# Altium PCB GRLV_double_Rail_v0.2b.PcbDoc
Units mil, origin at the board's own origin, x right, y up, seen from the top; angles counter-clockwise.
Board outline 6735 x 10540 mil, 2 copper layers (Top Layer, Bottom Layer); 179 components, 86 nets, 450 pads, 10 vias.
Unrouted connection lines stored in the file: 3.
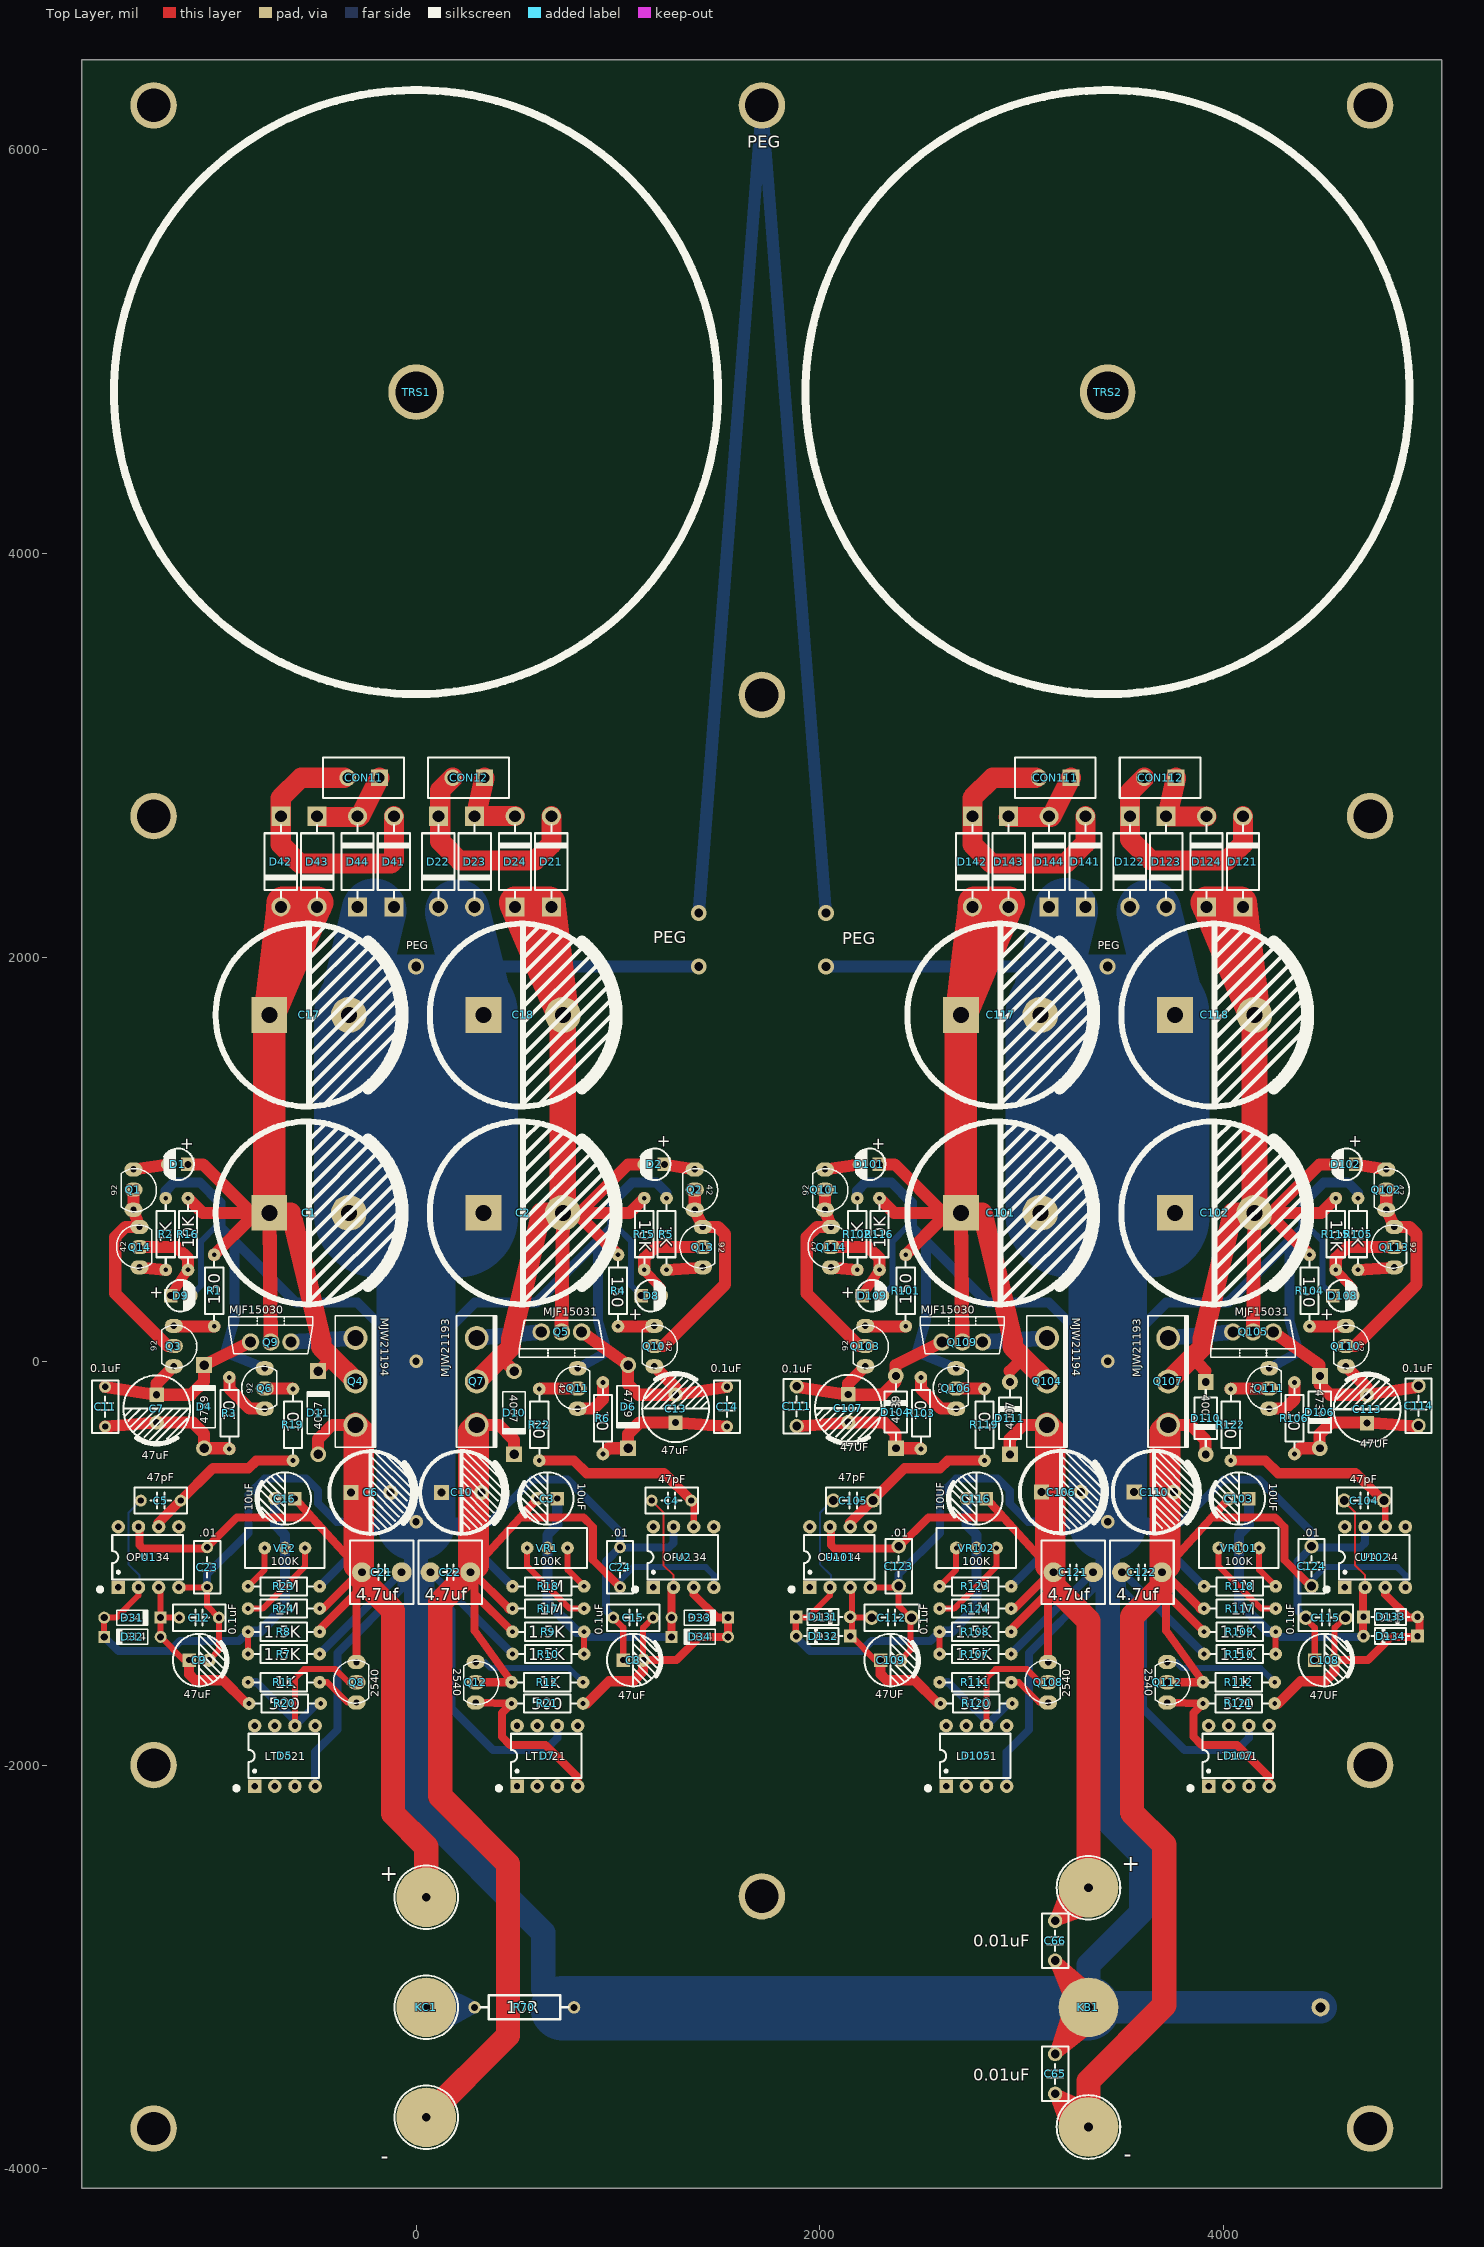
[diagram p0: Top Layer view]
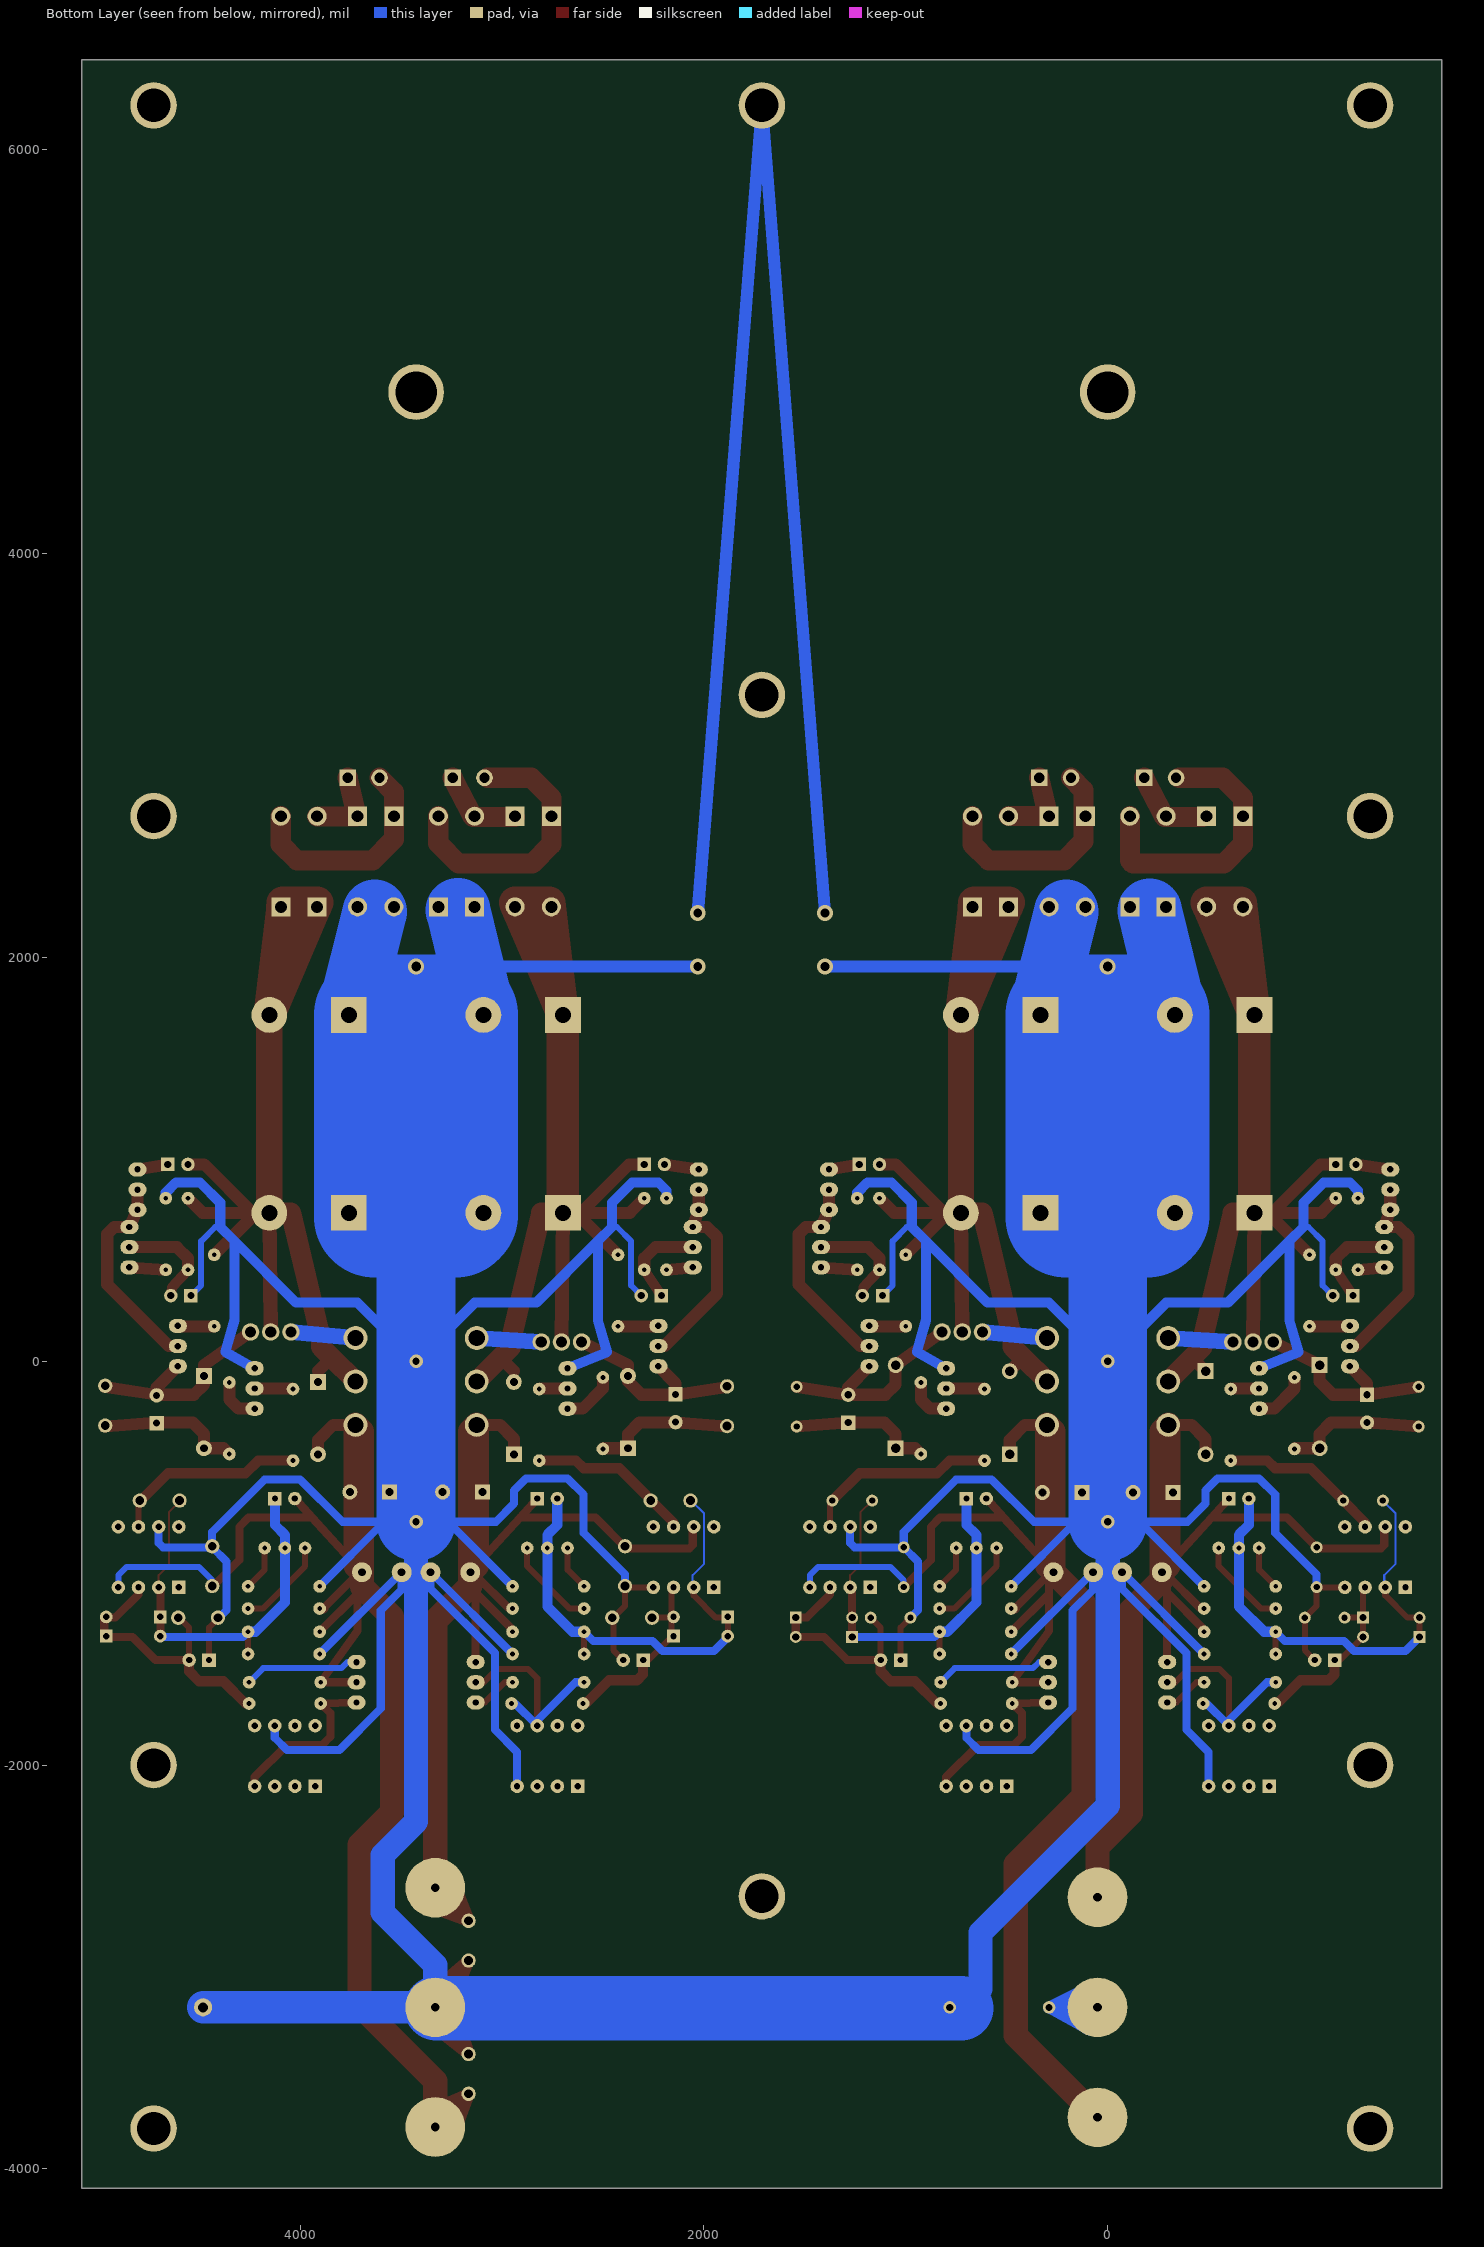
[diagram p1: Bottom Layer view, seen from below]
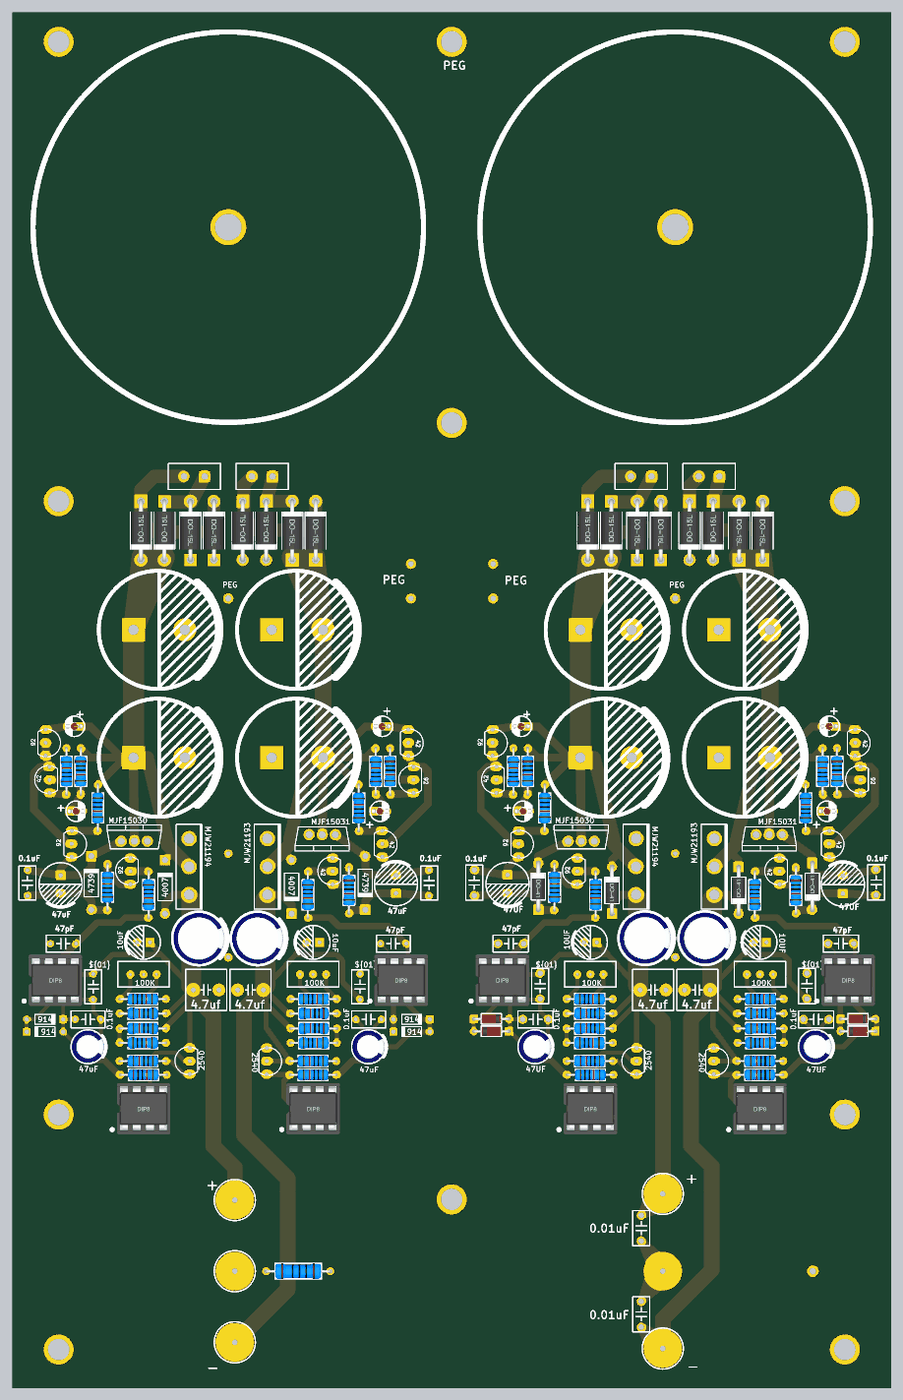
[diagram p2: 3D render of the assembled board from above, using the file's embedded part models]

## Layer stack, top to bottom
Top Solder: solder mask 0.4, Solder Resist, Dk 3.5
Top Layer: signal copper 2.8
Dielectric 1: dielectric 12.6, FR-4, Dk 4.8
Bottom Layer: signal copper 2.8
Bottom Solder: solder mask 0.4, Solder Resist, Dk 3.5

## Board outline
-1655,-4095 5080,-4095 5080,6445 -1655,6445

## Design rules (kind name [scope] priority, off if disabled: settings)
Clearance [All] p1: gap=10 ignorepadtopadclearanceinfootprint=FALSE except(0: Arc-Hole Track-Hole SMDPad-Hole THPad-Hole Via-Hole Fill-Hole Poly-Hole Region-Hole Text-Hole)
PlaneClearance [All] p1: clearance=30
PlaneConnect [All] p1: planeconnectstyle=Relief reliefexpansion=20 reliefentries=4 reliefconductorwidth=20 reliefairgap=30
PolygonConnect [All] p1: thpad.connectstyle=Relief thpad.reliefconductorwidth=20 thpad.reliefentries=4 thpad.polygonreliefangle="45 Angle" thpad.airgapwidth=20 smdpad.connectstyle=Relief smdpad.reliefconductorwidth=20 smdpad.reliefentries=4 smdpad.polygonreliefangle="90 Angle" smdpad.airgapwidth=20 via.connectstyle=Relief via.reliefconductorwidth=20 via.reliefentries=4 via.polygonreliefangle="45 Angle" via.airgapwidth=20
RoomDefinition GRLV_double_Rail_v0.2b_P1 [InComponentClass('GRLV_double_Rail_v0.2b_P1')] p1: confinementstyle=ConfineIn formatcopy=TRUE lockcomponents=FALSE outline -1625,-2162.83 1625,-2162.83 1625,3007.17 -1625,3007.17
RoomDefinition GRLV_double_Rail_v0.2b_P2 [InComponentClass('GRLV_double_Rail_v0.2b_P2')] p2: confinementstyle=ConfineIn formatcopy=TRUE lockcomponents=FALSE outline 1800,-2162.83 5050,-2162.83 5050,3007.17 1800,3007.17
RoutingVias [All] p1: holewidth=28 width=50 viastyle="Through Hole" minholewidth=28 minwidth=50 maxholewidth=28 maxwidth=50
SolderMaskExpansion [All] p1: expansion=4
Width [All] p1: maxlimit=700 minlimit=10 preferedwidth=60
28 further rules are at their usual default settings.

## Classes and differential pairs
component class GRLV_double_Rail_v0.2b_P2: C65 C66 C101 C102 C103 C104 C105 C106 C107 C108 C109 C110 C111 C112 C113 C114 C115 C116 C117 C118 C121 C122 C123 C124 CON111 CON112 D101 D102 D104 D105 D106 D107 D108 D109 D110 D111 D121 D122 D123 D124 D131 D132 D133 D134 D141 D142 D143 D144 KB1 Q101 Q102 Q103 Q104 Q105 Q106 Q107 Q108 Q109 Q110 Q111 Q112 Q113 Q114 R101 R102 R103 R104 R105 R106 R107 R108 R109 R110 R111 R112 R115 R116 R117 R118 R119 R120 R121 R122 R123 R124 TRS2 U101 U102 VR101 VR102
component class GRLV_double_Rail_v0.2b_P1: C1 C2 C3 C4 C5 C6 C7 C8 C9 C10 C11 C12 C13 C14 C15 C16 C17 C18 C21 C22 C23 C24 CON11 CON12 D1 D2 D4 D5 D6 D7 D8 D9 D10 D11 D21 D22 D23 D24 D31 D32 D33 D34 D41 D42 D43 D44 KC1 Q1 Q2 Q3 Q4 Q5 Q6 Q7 Q8 Q9 Q10 Q11 Q12 Q13 Q14 R1 R2 R3 R4 R5 R6 R7 R8 R9 R10 R11 R12 R15 R16 R17 R18 R19 R20 R21 R22 R23 R24 R70 TRS1 U1 U2 VR1 VR2

## Components (designator, comment, footprint, x,y, rotation, side; value= is the part's Value field where it differs from the comment)
C1 "4700UF/35V" "CAP 10*22*31.5" -530,735 r0 top
C2 "4700UF/35V" "CAP 10*22*31.5" 530,735 r0 top
C3 "10uF" "CAP 2.5*6.3*7" 650,-680 r180 top
C4 "47pF" "CBB 6.3*6.3*5"#1 1265,-690 r180 top
C5 "47pF" "CBB 6.3*6.3*5"#1 -1265,-690 r180 top
C6 "220UF/35V" "CAP 5.0*10*12.5" -225,-650 r0 top
C7 "47uF" "CAP 3.5*8*11.5" -1285,-235 r270 top
C8 "47uF" "CAP 2.5*6.3*11.2" 1075,-1480 r0 top
C9 "47uF" "CAP 2.5*6.3*11.2" -1075,-1480 r0 top
C10 "220UF/35V" "CAP 5.0*10*12.5" 225,-650 r0 top
C11 "0.1uF" "CBB 6.3*6.3*5"#1 -1540,-225 r270 top
C12 "0.1uF" "CBB 6.3*6.3*5"#1 -1075,-1270 r0 top
C13 "47uF" "CAP 3.5*8*11.5" 1285,-235 r90 top
C14 "0.1uF" "CBB 6.3*6.3*5"#1 1540,-225 r90 top
C15 "0.1uF" "CBB 6.3*6.3*5"#1 1075,-1270 r180 top
C16 "10uF" "CAP 2.5*6.3*7" -650,-680 r180 top
C17 "4700UF/35V" "CAP 10*22*31.5" -530,1715 r0 top
C18 "4700UF/35V" "CAP 10*22*31.5" 530,1715 r0 top
C21 "4.7uf" "CBB 7.2*7.2*13" -170,-1045 r0 top
C22 "4.7uf" "CBB 7.2*7.2*13" 170,-1045 r0 top
C23 ".01" "CBB 6.3*6.3*5"#1 -1035,-1020 r90 top value=0.01uF
C24 ".01" "CBB 6.3*6.3*5"#1 1010,-1020 r270 top value=0.01uF
C65 "0.01uF" "CBB 6.3*6.3*5"#2 3165,-3530 r270 top
C66 "0.01uF" "CBB 6.3*6.3*5"#2 3165,-2870 r90 top
C101 "4700UF/35V" "CAP 10*22*31.5" 2895,735 r0 top
C102 "4700UF/35V" "CAP 10*22*31.5" 3955,735 r0 top
C103 "10UF" "CAP 2.5*6.3*7" 4075,-680 r180 top
C104 "47pF" "CBB 6.3*6.3*5"#2 4695,-690 r180 top
C105 "47pF" "CBB 6.3*6.3*5"#2 2165,-690 r180 top
C106 "220UF/35V" "CAP 5.0*10*12.5" 3195,-647.83 r0 top
C107 "47UF" "CAP 3.5*8*11.5" 2140,-232.83 r270 top
C108 "47UF" "CAP 2.5*6.3*11.2" 4500,-1480 r0 top
C109 "47UF" "CAP 2.5*6.3*11.2" 2350,-1480 r0 top
C110 "220UF/35V" "CAP 5.0*10*12.5" 3655,-647.83 r0 top
C111 "0.1uF" "CBB 6.3*6.3*5"#2 1885,-222.83 r270 top
C112 "0.1uF" "CBB 6.3*6.3*5"#2 2355,-1270 r0 top
C113 "47UF" "CAP 3.5*8*11.5" 4710,-237.83 r90 top
C114 "0.1uF" "CBB 6.3*6.3*5"#2 4965,-220 r90 top
C115 "0.1uF" "CBB 6.3*6.3*5"#2 4505,-1270 r180 top
C116 "10UF" "CAP 2.5*6.3*7" 2775,-680 r180 top
C117 "4700UF/35V" "CAP 10*22*31.5" 2895,1715 r0 top
C118 "4700UF/35V" "CAP 10*22*31.5" 3955,1715 r0 top
C121 "4.7uf" "CBB 7.2*7.2*13" 3255,-1045 r0 top
C122 "4.7uf" "CBB 7.2*7.2*13" 3595,-1045 r0 top
C123 ".01" "CBB 6.3*6.3*5"#2 2390,-1015 r90 top value=0.01uF
C124 ".01" "CBB 6.3*6.3*5"#2 4435,-1015 r270 top value=0.01uF
CON11 "AC220-2" HX4.0-2XS -260,2890 r180 top
CON12 "AC220-2" HX4.0-2XS 260,2890 r180 top
CON111 "AC220-2" HX4.0-2XS 3165,2890 r180 top
CON112 "AC220-2" HX4.0-2XS 3685,2890 r180 top
D1 "+" "LED 3MM-R" -1180,975 r180 top
D2 "+" "LED 3MM-R" 1180,975 r180 top
D4 "4739" DO-41#1 -1050,-225 r90 top
D5 "LT1021" DIP8-300_MH -650,-1955 r90 top
D6 "4739" DO-41#1 1050,-225 r270 top
D7 "LT1021" DIP8-300_MH 650,-1955 r90 top
D8 "+" "LED 3MM-R" 1165,325 r0 top
D9 "+" "LED 3MM-R" -1165,325 r0 top
D10 "4007" DO-41#1 485,-255 r270 top
D11 "4007" DO-41#1 -485,-255 r90 top
D21 "HFA08" DO-15XL 670,2475 r90 top
D22 "HFA08" DO-15XL 110,2475 r270 top
D23 "HFA08" DO-15XL 290,2475 r270 top
D24 "HFA08" DO-15XL 490,2475 r90 top
D31 "914" DO-35#1 -1405,-1270 r0 top
D32 "914" DO-35#1 -1405,-1365 r180 top
D33 "914" DO-35#1 1405,-1270 r0 top
D34 "914" DO-35#1 1405,-1365 r180 top
D41 "VS-HFA08TB60-M3" DO-15XL -110,2475 r90 top
D42 "VS-HFA08TB60-M3" DO-15XL -670,2475 r270 top
D43 "VS-HFA08TB60-M3" DO-15XL -490,2475 r270 top
D44 "VS-HFA08TB60-M3" DO-15XL -290,2475 r90 top
D101 "+" "LED 3MM-R" 2245,975 r180 top
D102 "+" "LED 3MM-R" 4605,975 r180 top
D104 "4739" DO-41#2 2375.94,-251.77 r90 top
D105 "LT1021" DIP8-300_MH 2775,-1955 r90 top
D106 "4739" DO-41#2 4475.94,-251.77 r270 top
D107 "LT1021" DIP8-300_MH 4075,-1955 r90 top
D108 "+" "LED 3MM-R" 4590,325 r0 top
D109 "+" "LED 3MM-R" 2260,325 r0 top
D110 "4007" DO-41#2 3910.94,-281.77 r270 top
D111 "4007" DO-41#2 2940.94,-281.77 r90 top
D121 "VS-HFA08TB60-M3" DO-15XL 4095,2475 r90 top
D122 "VS-HFA08TB60-M3" DO-15XL 3535,2475 r270 top
D123 "VS-HFA08TB60-M3" DO-15XL 3715,2475 r270 top
D124 "VS-HFA08TB60-M3" DO-15XL 3915,2475 r90 top
D131 "914" DO-35#2 2016.06,-1266.34 r0 top
D132 "914" DO-35#2 2016.06,-1361.34 r180 top
D133 "914" DO-35#2 4826.06,-1266.34 r0 top
D134 "914" DO-35#2 4826.06,-1361.34 r180 top
D141 "VS-HFA08TB60-M3" DO-15XL 3315,2475 r90 top
D142 "VS-HFA08TB60-M3" DO-15XL 2755,2475 r270 top
D143 "VS-HFA08TB60-M3" DO-15XL 2935,2475 r270 top
D144 "VS-HFA08TB60-M3" DO-15XL 3135,2475 r90 top
KB1 "KCBuff_PowerPin" KCBUFF_POWERPIN_M4 3330,-3200 r0 top
KC1 "KCInputVas_PowerPin" KCIN_VAS_POWERPIN_M4 50,-3200 r0 top
Q1 "92" TO92A -1400,950 r0 top
Q2 "42" TO92A 1380,950 r0 top
Q3 "92" TO92A -1200,175 r0 top
Q4 "MJW21194" TO247V#1 -300,115 r270 top
Q5 "MJF15031" TO220V 820,145 r180 top
Q6 "92" TO92A -750,-235 r180 top
Q7 "MJW21193" TO247V#1 300,115 r270 top
Q8 "2540" TO92A -295,-1690 r180 top
Q9 "MJF15030" TO220V -820,95 r0 top
Q10 "42" TO92A 1180,175 r0 top
Q11 "42" TO92A 800,-235 r180 top
Q12 "2540" TO92A 295,-1490 r0 top
Q13 "92" TO92A 1420,465 r180 top
Q14 "42" TO92A -1370,465 r180 top
Q101 "92" TO92A 2025,950 r0 top
Q102 "42" TO92A 4805,950 r0 top
Q103 "92" TO92A 2225,175 r0 top
Q104 "MJW21194" TO247V#2 3125,-100 r270 top
Q105 "MJF15031" TO220V 4245,145 r180 top
Q106 "92" TO92A 2675,-235 r180 top
Q107 "MJW21193" TO247V#2 3725,-100 r270 top
Q108 "2540" TO92A 3130,-1690 r180 top
Q109 "MJF15030" TO220V 2605,95 r0 top
Q110 "42" TO92A 4605,175 r0 top
Q111 "42" TO92A 4225,-235 r180 top
Q112 "2540" TO92A 3720,-1490 r0 top
Q113 "92" TO92A 4845,465 r180 top
Q114 "42" TO92A 2055,465 r180 top
R1 "150" "RS 1/4W" -1000,350 r270 top
R2 "1K" "RS 1/4W" -1240,630 r90 top
R3 "10" "RS 1/4W" -925,-257.17 r90 top
R4 "150" "RS 1/4W" 1000,350 r90 top
R5 "1K" "RS 1/4W" 1240,630 r270 top
R6 "10" "RS 1/4W" 925,-282.17 r270 top
R7 "1.5K" "RS 1/4W" -655,-1450 r0 top
R8 "1.5K" "RS 1/4W" -655,-1340 r180 top
R9 "1.5K" "RS 1/4W" 655,-1340 r180 top
R10 "1.5K" "RS 1/4W" 655,-1450 r0 top
R11 "1K" "RS 1/4W" -655,-1590 r180 top
R12 "1K" "RS 1/4W" 650,-1590 r180 top
R15 "10K" "RS 1/4W" 1130,630 r90 top
R16 "10K" "RS 1/4W" -1130,630 r270 top
R17 "1M" "RS 1/4W" 655,-1225 r180 top
R18 "1M" "RS 1/4W" 655,-1115 r0 top
R19 "10" "RS 1/4W" -610,-315 r270 top
R20 "500" "RS 1/4W" -650,-1695 r0 top
R21 "500" "RS 1/4W" 650,-1695 r180 top
R22 "10" "RS 1/4W" 610,-315 r270 top
R23 "1M" "RS 1/4W" -655,-1115 r0 top
R24 "1M" "RS 1/4W" -655,-1225 r180 top
R70 "10R" "RS 1/2W" 536.06,-3200 r180 top
R101 "150" "RS 1/4W" 2425,350 r270 top
R102 "1K" "RS 1/4W" 2185,630 r90 top
R103 "10" "RS 1/4W" 2500,-257.17 r90 top
R104 "150" "RS 1/4W" 4425,350 r90 top
R105 "1K" "RS 1/4W" 4665,630 r270 top
R106 "10" "RS 1/4W" 4350,-282.17 r270 top
R107 "1.5K" "RS 1/4W" 2770,-1450 r0 top
R108 "1.5K" "RS 1/4W" 2770,-1340 r180 top
R109 "1.5K" "RS 1/4W" 4080,-1340 r180 top
R110 "1.5K" "RS 1/4W" 4080,-1450 r0 top
R111 "1K" "RS 1/4W" 2770,-1590 r180 top
R112 "1K" "RS 1/4W" 4075,-1590 r180 top
R115 "10K" "RS 1/4W" 4555,630 r90 top
R116 "10K" "RS 1/4W" 2295,630 r270 top
R117 "1M" "RS 1/4W" 4080,-1225 r180 top
R118 "1M" "RS 1/4W" 4080,-1115 r0 top
R119 "10" "RS 1/4W" 2815,-315 r270 top
R120 "500" "RS 1/4W" 2775,-1695 r0 top
R121 "500" "RS 1/4W" 4075,-1695 r180 top
R122 "10" "RS 1/4W" 4035,-315 r270 top
R123 "1M" "RS 1/4W" 2770,-1115 r0 top
R124 "1M" "RS 1/4W" 2770,-1225 r180 top
TRS1 "TRANSFORMER" TRANS_BLOCK_30W_24V 0,4800 r0 top
TRS2 "TRANSFORMER" TRANS_BLOCK_30W_24V 3425,4800 r0 top
U1 "OPA134" DIP8-300_MH -1325,-970 r90 top
U2 "OPA134" DIP8-300_MH 1325,-970 r90 top
U101 "OPA134" DIP8-300_MH 2100,-970 r90 top
U102 "OPA134" DIP8-300_MH 4750,-970 r90 top
VR1 "100K" "RS 1/2W-VR" 650,-925 r180 top
VR2 "100K" "RS 1/2W-VR" -650,-925 r180 top
VR101 "100K" "RS 1/2W-VR" 4075,-925 r180 top
VR102 "100K" "RS 1/2W-VR" 2775,-925 r180 top

## Footprints (in the part's own frame and the unit in brackets; to place one, negate y for a bottom-side part, rotate by r counter-clockwise, add the part's x,y. Pads: shape width x height; smd on the part's side, far side on the other; paste and mask are expansions set on the pad)
"CAP 2.5*6.3*7" [mm] "脚距2.5mm直径6.3mm高度7mm"
  rect 1.7x1.7 hole 0.8: 1(-1.25,0)
  round 1.7 hole 0.8: 2(1.25,0)
  silkscreen extent -3.3,-3.3 3.56,3.3, body extent -3.15,-3.15 3.16,3.15, height 7.03
"CAP 2.5*6.3*11.2" [mm] "脚距2.5mm直径6.3mm高度11.2mm"
  rect 1.7x1.7 hole 0.8: 1(-1.25,0)
  round 1.7 hole 0.8: 2(1.25,0)
  silkscreen extent -3.3,-3.3 3.56,3.3, body extent -3.15,-3.15 3.16,3.15, height 11.23
"CAP 3.5*8*11.5" [mm] "脚距3.5mm直径8mm高度11.5mm"
  rect 1.8x1.8 hole 0.9: 1(-1.75,0)
  round 1.8 hole 0.9: 2(1.75,0)
  silkscreen extent -4.2,-4.2 4.5,4.2, body extent -4,-4 4.01,4, height 11.53
"CAP 5.0*10*12.5" [mm] "脚距5mm直径10mm高度12.5mm"
  rect 1.9x1.9 hole 1: 1(-2.5,0)
  round 1.9 hole 1: 2(2.5,0)
  silkscreen extent -5.2,-5.2 5.64,5.2, body extent -5,-5.01 5.01,4.99, height 12.55
"CAP 10*22*31.5" [mm] "脚距10mm直径22mm高度31.5mm"
  rect 4.5x4.5 hole 2: 1(-5,0)
  round 4.5 hole 2: 2(5,0)
  silkscreen extent -11.74,-11.51 11.74,11.49, body extent -11,-11 11.01,11, height 31.53
"CBB 6.3*6.3*5"#1 [mm] "脚距5mm高6.3mm厚3mm"
  round 1.5 hole 0.8: 1(-2.5,0) 2(2.5,0)
  silkscreen extent -3.3,-1.65 3.3,1.65, body extent -3.15,-1.5 3.15,1.5, height 6.8
"CBB 6.3*6.3*5"#2 [mm] "脚距5mm高6.3mm厚3mm"
  round 1.8 hole 1.1: 1(-2.5,0) 2(2.5,0)
  silkscreen extent -3.43,-1.65 3.43,1.65, body extent -3.15,-1.5 3.15,1.5, height 6.8
"CBB 7.2*7.2*13" [mm] "脚距5mm高13mm厚7.2mm"
  round 2.5 hole 1: 1(-2.5,0) 2(2.5,0)
  silkscreen extent -4,-4 4,4, body extent -4,-4 4,4, height 17.53
DIP8-300_MH [mm] "带底座 9.4*7.6*3.8(长宽高）"
  rect 1.7x1.7 hole 0.8: 1(-3.81,3.81)
  round 1.7 hole 0.8: 2(-3.81,1.27) 3(-3.81,-1.27) 4(-3.81,-3.81) 5(3.81,-3.81) 6(3.81,-1.27) 7(3.81,1.27) 8(3.81,3.81)
  silkscreen extent -4.32,-4.32 2.79,6.35, body extent -5,-5.19 5,5.19, height 7.7
DO-15XL [mm] "4*11.4mm(直径，脚距）1.5孔径"
  rect 2.4x2.4 hole 1.5: 1(-5.7,0)
  round 2.4 hole 1.5: 2(5.7,0)
  silkscreen extent -4.57,-2.03 4.57,2.03, body extent -6.1,-2 6.1,2, height 4.05
DO-35#1 [mm] "Diode, Axial; Body 3.8 x 1.9 mm (LxDia. max), Lead Dia. 0.53 mm (max)"
  round 1.5 hole 0.9: 1(-3.55,0)
  rect 1.5x1.5 hole 0.9: 2(3.55,0)
  silkscreen extent -1.95,-0.95 2.05,0.95
DO-35#2 [mm] "1.8*6.8mm(直径，脚距）"
  rect 1.6x1.6 hole 0.8: 1(-3.4,0)
  round 1.6 hole 0.8: 2(3.4,0)
  silkscreen extent -2.41,-1.02 2.41,1.02, body extent -3.65,-0.9 3.65,0.9, height 1.85
DO-41#1 [mm] "Diode, Axial; Body 5.2 x 2.7 mm (LxDia. max), Lead Dia. 0.86 mm (max)"
  round 2 hole 1.2: 1(-5.23,0)
  rect 2x2 hole 1.2: 2(5.23,0)
  silkscreen extent -2.65,-1.4 2.75,1.4
DO-41#2 [mm] "2.6*9.1mm(直径，脚距）"
  rect 2x2 hole 1: 1(-4.55,0)
  round 2 hole 1: 2(4.55,0)
  silkscreen extent -3.56,-1.4 3.56,1.4, body extent -4.92,-1.29 4.98,1.31, height 2.65
HX4.0-2XS [mm]
  rect 2.1x2.1 hole 1.3: 1(-2,0)
  round 2.1 hole 1.3: 2(2,0)
  silkscreen extent -5.08,-2.54 5.08,2.54
KCBUFF_POWERPIN_M4 [mm]
  round 7.5 hole 1.1: 1(0,15.05) 2(0,-15.05) 3(0,0)
  silkscreen extent -4,-19.05 4,19.05
KCIN_VAS_POWERPIN_M4 [mm]
  round 7.5 hole 1.1: 1(0,13.843) 2(0,-13.843) 3(0,0)
  silkscreen extent -4,-17.84 4,17.84
"LED 3MM-R" [mm] "红色3mm直插LED"
  rect 1.7x1.7 hole 0.9: 1(-1.27,0)
  round 1.7 hole 0.9: 2(1.27,0)
  silkscreen extent -2.01,-2 1.72,1.98, body extent -1.95,-1.95 1.64,1.95, height 5.55
"RS 1/2W" [mil] "直插色环电阻，脚距12.5mm，直径3mm"
  round 62 hole 35.43: 1(-246.06,0) 2(246.06,0)
  silkscreen extent -217,-59 217,59, body extent -256,-59 256,59, height 122
"RS 1/2W-VR" [mm] "直插3脚顶调可调电阻，脚距2.54mm，长10mm*宽5mm*高10mm"
  round 1.6 hole 0.6: 1(-2.54,0) 2(2.54,0) 3(0,0)
  silkscreen extent -5,-2.5 5,2.5
"RS 1/4W" [mm] "直插色环电阻，脚距9mm，直径2.3mm"
  round 1.6 hole 0.6: 1(-4.5,0) 2(4.5,0)
  silkscreen extent -3.68,-1.14 3.68,1.14, body extent -4.72,-1.16 4.73,1.16, height 2.32
TO92A [mil]
  oval 90x70 hole 31.5: 1(0,0) 2(0,-100) 3(0,-200)
  silkscreen extent -60,-209 114,4
TO220V [mm]
  round 2.2 hole 1.397: 1(0,0) 2(2.54,0) 3(5.08,0)
  silkscreen extent -2.75,-1.48 7.83,3.18
TO247V#1 [mm]
  round 3 hole 2.032: 1(0,0) 2(5.461,0) 3(10.922,0)
  silkscreen extent -2.79,-2.54 13.72,2.54
TO247V#2 [mm]
  round 3 hole 2.032: 1(-5.461,0) 2(0,0) 3(5.461,0)
  silkscreen extent -8.25,-2.54 8.25,2.54
TRANS_BLOCK_30W_24V [mm] "Transformer 30W 24v 70mm"
  round 7 hole 5.2: 1(0,0)
  silkscreen extent -38,-38 38,38

## Part data
C1 C2 C3 C6 C7 C8 C9 C10 C13 C16 C17 C18 C101 C102 C103 C106 C107 C108 C109 C110 C113 C116 C117 C118: library part C-CAP, "直插电解电容", BOM名称=直插电解电容, 学习资源=www.ooocke.com, 版权归属=源创客
C4 C5 C11 C12 C14 C15 C23 C24 C65 C66 C104 C105 C111 C112 C114 C115 C123 C124: library part C-CBB, "CBB电容", BOM名称=CBB电容, 学习资源=www.ooocke.com, 版权归属=源创客
C21 C22 C121 C122: library part C-MKS, "MKS薄膜电容"
D1 D2 D8 D9 D101 D102 D108 D109: library part LED, "直插式LED"
D4 D6 D104 D106: library part 1N4739, "9.1V/1W稳压管"
D5 D7 D105 D107: library part LT1021-10-2P, "10V Precision Reference 2 Pin Config"
D10 D11 D110 D111: library part 1N4007, "整流二极管", BOM名称=整流二极管, 学习资源=www.ooocke.com, 版权归属=源创客
D21 D22 D23 D24: library part VS-HFA08TB60-M3, "Ultrafast Soft Recovery Diado 8A 600V"
D31 D32 D33 D34 D131 D132 D133 D134: library part 1N914, "高速开关管 1V/0.25W"
D41 D42 D43 D44 D121 D122 D123 D124 D141 D142 D143 D144: "Ultrafast Soft Recovery Diado 8A 600V"
KB1: "King Cello Buffer Stage"
KC1: "King Cello Input Stage and VAS"
Q1 Q3 Q6 Q13 Q101 Q103 Q106 Q113: library part KSP92/93, "High Voltage PNP Transistor"
Q2 Q10 Q11 Q14 Q102 Q110 Q111 Q114: library part KSP42/43, "High Voltage NPN Transistor"
Q4 Q9 Q104 Q109: "Power NPN Transistor"
Q5 Q7 Q105 Q107: "Power PNP Transistor"
Q8 Q12 Q108 Q112: library part DN2540, "N沟道耗尽型DMOS场效应管 400V/150ma"
R1 R2 R3 R4 R5 R6 R7 R8 R9 R10 R11 R12 R15 R16 R17 R18 R19 R20 R21 R22 R23 R24 R70 R101 R102 R103 R104 R105 R106 R107 R108 R109 R110 R111 R112 R115 R116 R117 R118 R119 R120 R121 R122 R123 R124: library part R-CRR, "直插色环电阻", BOM名称=色环电阻, 学习资源=www.ooocke.com, 版权归属=源创客
TRS1 TRS2: "Transformer"
U1 U2 U101 U102: library part OPA134PA
VR1 VR2 VR101 VR102: library part VR-W, "直插可调电阻-顶调"

## Free pads (board coordinates)
  round 230 hole 165: 2(-1300,-3800) 2(-1300,-2000) 2(-1300,2700) 2(-1300,6220) 2(1712.5,-2650) 2(1712.5,3300) 2(1712.5,6220) 2(4725,-3800) 2(4725,-2000) 2(4725,2700) 2(4725,6220)
  round 90 hole 50: 2(4480,-3200)

## Via types
v1: diameter 78, hole 43, Top Layer to Bottom Layer, 4 vias
v2: diameter 66, hole 36, Top Layer to Bottom Layer, 4 vias
v3: diameter 80, hole 48, Top Layer to Bottom Layer, 2 vias

## Nets (pads, with @x,y where several pads share a name; then routed paths per layer and width w, separated by ;. In a path a pad name is that pad's centre, name@x,y a point inside that pad or via, vN(x,y) a via of type N, cw(c..) or ccw(c..) an arc to the next point about the centre after c; other vN are vias at no path point)
GND: C1.2 C2.1 C6.2 C8.1 C9.2 C10.1 C12.2 C15.2 C17.2 C18.1 C21.2 C22.1 C23.1 C24.1 C65.1 C66.1 C101.2 C102.1 C106.2 C108.1 C109.2 C110.1 C112.2 C115.2 C117.2 C118.1 C121.2 C122.1 C123.1 C124.1 D5.4 D7.6 D8.1 D9.2 D22.2 D23.2 D41.1 D44.1 D105.4 D107.6 D108.1 D109.2 D122.2 D123.2 D141.1 D144.1 KB1.3 pad.2@1712.5,6220 pad.2@4480,-3200 Q6.3 Q11.3 Q106.3 Q111.3 R2.2 R5.1 R7.2 R10.1 R18.1 R23.2 R70.1 R102.2 R105.1 R107.2 R110.1 R118.1 R123.2 TRS1.1 TRS2.1 U1.4 U2.7 U101.4 U102.7 | length 61948
  Top Layer w30: U1.4 -1036.57,-1120 C23.1 -1035,-1211.57 C12.2 -976.57,-1430.79 C9.2 ; C15.2 1025.79,-1319.21 C8.1 ; U101.4 2388.43,-1120 2390,-1118.43 2390,-1211.57 2448.43,-1270 2448.43,-1430.79 C109.2 ; C115.2@4401.57,-1270 4450.79,-1319.21 C108.1
  Top Layer w60: KB1.3@3235,-3210 C65.1 ; KB1.3@3250,-3180 C66.1 ; KB1.3@3350,-3285 C65.1 ; KB1.3@3360,-3135 C66.1 ; C65.1 KB1.3 C66.1
  Bottom Layer w30: D9.2 -1065,375 -1065,595 -995,665 -970,665 ; C23.1 C23.1@-1028.15,-1118.43 ; 970,665 995,665 1065,595 1065,375 D8.1 ; D109.2 2360,375 2360,595 2430,665 2455,665 ; C123.1@2390,-1118.43 C123.1@2396.85,-1118.43 ; 4395,665 4420,665 4490,595 4490,375 D108.1
  Bottom Layer w40: C23.1 -1035,-1055 -830,-850 -830,-660 -750,-580 -545,-580 -485,-640 -485,-705 -395,-795 -185,-795 ; D5.4 -500,-1935 -390,-1825 -390,-1445 -71.57,-1126.57 C21.2 -72.83,-1045 R7.2 ; R23.2 -185,-822.17 -185,-795 ; R10.1 72.83,-1045 C22.1 71.57,-1131.57 175,-1235 175,-1720 380,-1925 640,-1925 700,-1865 D7.6 ; R18.1 157.83,-795 ; C15.2 940,-1233.43 940,-991.57 C24.1 ; U2.7 1275,-900 1253.43,-921.57 C24.1 ; C123.1@2390,-1118.43 C123.1 2390,-1055 2595,-850 2595,-660 2675,-580 2880,-580 2940,-640 2940,-705 3030,-795 3240,-795 ; D105.4 2925,-1935 3035,-1825 3035,-1445 3353.43,-1126.57 C121.2 3352.17,-1045 R107.2 ; R123.2 3240,-822.17 3240,-795 ; R110.1 3497.83,-1045 C122.1 3496.57,-1131.57 3600,-1235 3600,-1720 3805,-1925 4065,-1925 4125,-1865 D107.6 ; R118.1 3582.83,-795 ; C115.2@4401.57,-1270 4365,-1233.43 4365,-991.57 C124.1@4435,-921.57 ; U102.7 4700,-900 4678.43,-921.57 C124.1@4435,-921.57 ; -185,-795 v2(0,-795) 157.83,-795 ; 157.83,-795 365,-795 575,-585 750,-585 1010,-845 C24.1 ; 3240,-795 v2(3425,-795) 3582.83,-795 ; 3582.83,-795 3790,-795 4000,-585 4175,-585 4435,-845 C124.1 C124.1@4435,-921.57
  Bottom Layer w50: R2.2 -1240,845 -1200,885 -1070,885 -970,785 -970,665 -900,595 ; Q6.3 -945,45 -900,205 -900,595 ; Q11.3 945,45 900,205 900,595 ; R5.1 1240,835 1190,885 1070,885 970,785 970,665 900,595 ; R102.2 2185,845 2225,885 2355,885 2455,785 2455,665 2525,595 ; Q106.3 2480,45 2525,205 2525,595 ; Q111.3 4370,45 4325,205 4325,595 ; R105.1 4665,835 4615,885 4495,885 4395,785 4395,665 4325,595 ; -900,595 -595,290 -290,290 v2(0,0) 290,290 595,290 900,595 ; 2525,595 2830,290 3135,290 v2(3425,0) 3715,290 4020,290 4325,595
  Bottom Layer w60: v3(0,1955) 272.84,1955 v1(1400,1955) ; v1(1400,2220) 1712.5,6220 v1(2030,2220) ; v1(2030,1955) 3149.88,1955 v3(3425,1955)
  Bottom Layer w90: -11.1,-205 0,-205 11.1,-205 ; 3413.9,-205 3425,-205 3436.1,-205
  Bottom Layer w120: -440,1720 -430,1730 ; -260,1830 -250,1820 ; v2(0,-795) 0,-2200 630,-2830 630,-3108.94 726.06,-3205 ; 250,1880 260,1890 ; 430,1755 435,1750 ; 2985,1720 2995,1730 ; 3165,1830 3175,1820 ; KB1.3@3325,-3205 KB1.3 3330,-2990 3590,-2730 3590,-2445 3425,-2280 v2(3425,-795) ; 3675,1880 3685,1890 ; 3855,1755 3860,1750
  Bottom Layer w160: KB1.3 pad.2@4480,-3200
  Bottom Layer w320: C17.2 -208.42,2230.86 -208.15,2231.97 ; 205,2225 272.84,1955 C18.1 ; 726.06,-3205 KB1.3@3325,-3205 ; C117.2 3149.88,1955 3216.58,2230.86 3217.4,2234.26 ; 3630,2225 C118.1
  Bottom Layer w390: v2(0,-795) 0,-205 v2(0,0) 0,685 ; v2(3425,-795) 3425,-205 v2(3425,0) 3425,685
  Bottom Layer w600: 0,685 -30,715 ; 3425,685 3395,715 ; -30,715 -195,715 -205,725 -205,1715 205,1715 205,715 -30,715 ; 3395,715 3630,715 3630,1715 3220,1715 3220,725 3230,715 3395,715
NetC1_1: C1.1 C17.1 D1.1 D11.2 D42.2 D43.2 Q4.2 Q9.2 R1.1 R16.1 | length 5178.4
  Top Layer w60: R16.1 -1057.83,735 C1.1@-815,735 ; D1.1 -1055,975 C1.1@-815,735 ; R1.1 -815,712.17 C1.1@-815,735 ; C1.1 C1.1@-815,735 ; D11.2 -417.5,17.5
  Top Layer w70: C1.1 Q9.2
  Top Layer w100: C1.1 -620,735 -470,105 -470,70 -417.5,17.5 Q4.2
  Top Layer w160: C1.1@-726.85,770 C17.1 ; C17.1 -497.8,2253.9 -490,2272.24 -660,2272.24 -662.56,2250.9 -662.63,2250.31 -662.7,2249.72 C17.1
NetC2_2: C2.2 C18.2 D2.2 D10.1 D21.1 D24.1 Q5.2 Q7.2 R4.2 R15.2 | length 5170.5
  Top Layer w60: 420,20 D10.1 ; C2.2 C2.2@810,735 ; R4.2 810,717.17 C2.2@810,735 ; R15.2 1057.83,735 C2.2@810,735 ; D2.2 1050,975 C2.2@810,735
  Top Layer w70: Q5.2 C2.2
  Top Layer w100: Q7.2 420,20 470,70 470,105 620,735 C2.2
  Top Layer w130: C2.2 C18.2
  Top Layer w160: D24.1@490,2272.24 497.8,2253.9 C18.2 662.7,2249.72 662.63,2250.31 662.56,2250.9 660,2272.24 D24.1@490,2272.24
NetC3_1: C3.1 C4.2 D33.1 D34.2 R9.1 R10.2 U2.2 VR1.3 | length 2055
  Top Layer w10: C4.2 1225,-748.43 1225,-1010 1275,-1060 U2.2
  Top Layer w30: R10.2 R9.1
  Top Layer w40: D34.2 D33.1 1265.24,-1129.76 U2.2
  Bottom Layer w40: R9.1 857.17,-1365 D34.2
  Bottom Layer w50: C3.1 699.21,-810.79 650,-860 VR1.3 650,-1195 795,-1340 R9.1
NetC3_2: C3.2 C10.2 C22.2 C24.2 D10.2 KC1.2 Q7.3 Q12.2 R9.2 R12.2 R17.2 U2.4 | length 8010.4
  Top Layer w40: C22.2 300,-1010.32 514.61,-774.64 ; C22.2@280,-1045 R17.2@460,-1225 ; C22.2@290,-1066.57 290,-1152.17 ; Q12.2 R12.2 290,-1335 290,-1152.17 ; R9.2 290,-1152.17 ; C3.2 514.61,-774.64 ; C24.2 875,-983.43 875,-820 829.64,-774.64 514.61,-774.64
  Top Layer w50: C22.2@280,-1045 C22.2 C22.2@290,-1066.57 ; R17.2@460,-1225 R17.2
  Top Layer w60: Q7.3 410,-315 485,-390 D10.2
  Top Layer w120: KC1.2 455,-3340 455,-2490 120,-2155 120,-1193.43 C22.2 ; C22.2 300,-1013.43 300,-1010.32 Q7.3 268.43,-346.57 C22.2
  Bottom Layer w30: C24.2 1010,-1085 1075,-1020 1435,-1020 1475,-1060 U2.4
NetC4_1: C4.1 R22.2 U2.6 | length 970.2
  Top Layer w30: C4.1 1375,-701.57 U2.6
  Top Layer w50: R22.2 782.17,-492.17 845,-555 1228.43,-555 C4.1
NetC5_1: C5.1 R19.2 U1.6 | length 813.4
  Top Layer w50: U1.6 -1275,-798.43 C5.1 -1006.57,-530 -830,-530 -792.17,-492.17 R19.2
NetC5_2: C5.2 C16.2 D31.1 D32.2 R7.1 R8.2 U1.2 VR2.3 | length 2508.9
  Top Layer w30: D32.2 D31.1 -1485,-1270 -1375,-1160 U1.2 ; R7.1 R8.2
  Bottom Layer w10: U1.2@-1370,-1120 -1370,-1060 -1425,-1005 -1425,-751.57 C5.2
  Bottom Layer w40: D32.2 -1474.76,-1435 -1220,-1435 -1170,-1385 -877.17,-1385 R8.2
  Bottom Layer w50: R8.2 -775,-1340 -650,-1215 VR2.3 -650,-860 -699.21,-810.79 C16.2
NetC6_1: C6.1 C16.1 C21.1 C23.2 D11.1 KC1.1 Q4.3 Q8.3 R8.1 R24.1 U1.7 | length 6017
  Top Layer w30: C23.2@-1040,-926.57 C23.2
  Top Layer w40: U1.7@-1370,-820 -1370,-910.79 -1354.21,-926.57 C23.2@-1040,-926.57 ; C23.2 -888.07,-774.64 -514.61,-774.64 ; C16.1 -514.61,-774.64 ; R8.1 -477.83,-1327.83 -295,-1145 ; R24.1 -460,-1225 C21.1@-295,-1060 ; Q8.3 -295,-1145 ; C21.1@-295,-1055 C21.1@-295,-1060 ; -514.61,-774.64 -300,-1010.32 C21.1 -280,-1045 C21.1@-295,-1060 ; -295,-1145 C21.1@-295,-1060
  Top Layer w60: D11.1 -485,-385 -415,-315 Q4.3
  Top Layer w120: KC1.1 50,-2405 -115,-2240 -115,-1235 -268.43,-1081.57 C21.1 ; C21.1 -300,-1013.43 -300,-1010.32 Q4.3 -268.43,-346.57 C21.1
NetC7_1: C7.1 C11.1 D4.2 Q3.3 Q9.1 | length 1034.4
  Top Layer w60: C11.1 C7.1 ; Q3.3 -1285,-110 C7.1 ; Q9.1 D4.2 -1050,-100 -1116.1,-166.1 C7.1
NetC7_2: C7.2 C11.2 D4.1 R3.1 | length 711.3
  Top Layer w60: C11.2 C7.2 -1106.1,-303.9 -1050,-360 D4.1 -928.43,-430.91 R3.1
NetC8_2: C8.2 C15.1 D33.2 D34.1 R21.1 U2.3 | length 1464.8
  Top Layer w30: C8.2 1124.21,-1319.21 C15.1
  Top Layer w40: C8.2 1290,-1480 1405,-1365 D34.1 D33.2 1490,-1270 1375,-1155 U2.3
  Top Layer w50: R21.1 845,-1695 955,-1585 1075,-1585 1124.21,-1535.79 C8.2
NetC9_1: C9.1 C12.1 D31.2 D32.1 R20.1 U1.3 | length 955
  Top Layer w30: U1.3 -1265.24,-1129.76 D31.2 ; C12.1 D31.2 ; C9.1 -1150.24,-1480 D32.1 D31.2
  Top Layer w50: C9.1 -1124.21,-1550.79 -1095,-1580 -955,-1580 -845,-1690 R20.1@-827.17,-1690
NetC13_1: C13.1 C14.1 D6.2 R6.2 | length 721.7
  Top Layer w60: R6.2 953.43,-430.91 D6.2 1050,-360 1106.1,-303.9 C13.1 C14.1
NetC13_2: C13.2 C14.2 D6.1 Q5.1 Q10.3 | length 1077.2
  Top Layer w60: Q5.1 D6.1 1050,-115 1101.1,-166.1 C13.2 ; Q10.3 1285,-130 C13.2 ; C14.2 C13.2
NetC65_2: C65.2 C103.2 C110.2 C122.2 C124.2 D110.2 KB1.2 Q107.3 Q112.2 R109.2 R112.2 R117.2 U102.4 | length 8611.8
  Top Layer w40: C122.2 3725,-1010.32 3939.61,-774.64 ; C122.2@3705,-1045 R117.2@3885,-1225 ; C122.2@3715,-1066.57 3715,-1152.17 ; Q112.2 R112.2 3715,-1335 3715,-1152.17 ; R109.2 3715,-1152.17 ; C103.2 3939.61,-774.64 ; C124.2@4435,-1118.43 4300,-983.43 4300,-820 4254.64,-774.64 3939.61,-774.64
  Top Layer w50: C122.2@3705,-1045 C122.2 C122.2@3715,-1066.57 ; R117.2@3885,-1225 R117.2
  Top Layer w60: KB1.2@3235,-3820 C65.2 ; KB1.2 C65.2 ; KB1.2@3350,-3710 3330,-3701.18 C65.2 ; Q107.3 3835,-315 3910,-390 D110.2@3910,-460.91
  Top Layer w120: KB1.2 3330,-3701.18 3330,-3565 3705,-3190 3705,-2395 3545,-2235 3545,-1265 3693.43,-1116.57 C122.2 ; C122.2 3725,-1013.43 3725,-1010.32 Q107.3 3693.43,-346.57 C122.2
  Bottom Layer w30: C124.2@4435,-1118.43 C124.2 4435,-1085 4500,-1020 4860,-1020 4900,-1060 U102.4
NetC66_2: C66.2 C106.1 C116.1 C121.1 C123.2 D111.1 KB1.1 Q104.3 Q108.3 R108.1 R124.1 U101.7 | length 6549.4
  Top Layer w30: C123.2@2385,-926.57 C123.2@2390,-921.57
  Top Layer w40: U101.7@2055,-820 2055,-910.79 2070.79,-926.57 C123.2@2385,-926.57 ; C123.2@2390,-921.57 2536.93,-774.64 2910.39,-774.64 ; C116.1 2910.39,-774.64 ; R108.1 2947.17,-1327.83 3130,-1145 ; R124.1 2965,-1225 C121.1@3130,-1060 ; Q108.3 3130,-1145 ; C121.1@3130,-1055 C121.1@3130,-1060 ; 2910.39,-774.64 3125,-1010.32 C121.1 3145,-1045 C121.1@3130,-1060 ; 3130,-1145 C121.1@3130,-1060
  Top Layer w60: D111.1@2940,-460.91 2940,-385 3010,-315 Q104.3 ; KB1.1@3235,-2590 C66.2 ; KB1.1 C66.2@3166.44,-2771.06 ; KB1.1@3365,-2700 3363.32,-2700.6 C66.2@3166.44,-2771.06 ; C66.2 C66.2@3166.44,-2771.06 ; C66.2 3165.93,-2771.57 C66.2@3166.44,-2771.06
  Top Layer w120: KB1.1 3330,-1285 3156.57,-1111.57 C121.1 ; C121.1 3125,-1013.43 3125,-1010.32 Q104.3 3156.57,-346.57 C121.1
NetC101_1: C101.1 C117.1 D101.1 D111.2 D142.2 D143.2 Q104.2 Q109.2 R101.1 R116.1 | length 5178.4
  Top Layer w60: R116.1 2367.17,735 C101.1@2610,735 ; D101.1 2370,975 C101.1@2610,735 ; R101.1 2610,712.17 C101.1@2610,735 ; C101.1 C101.1@2610,735 ; 2940,-49.09 3007.5,17.5
  Top Layer w70: C101.1 Q109.2
  Top Layer w100: C101.1 2805,735 2955,105 2955,70 3007.5,17.5 Q104.2
  Top Layer w160: C101.1@2698.15,770 C117.1 ; C117.1 2817.64,1996.13 2927.2,2253.9 2935,2272.24 2765,2272.24 2762.44,2250.9 2762.3,2249.72 2734.27,2016.09 C117.1
NetC102_2: C102.2 C118.2 D102.2 D110.1 D121.1 D124.1 Q105.2 Q107.2 R104.2 R115.2 | length 5170.5
  Top Layer w60: 3845,20 3910,-49.09 ; C102.2 C102.2@4235,735 ; R104.2 4235,717.17 C102.2@4235,735 ; R115.2 4482.83,735 C102.2@4235,735 ; D102.2 4475,975 C102.2@4235,735
  Top Layer w70: Q105.2 C102.2
  Top Layer w100: Q107.2 3845,20 3895,70 3895,105 4045,735 C102.2
  Top Layer w130: C102.2 C118.2
  Top Layer w160: D124.1@3915,2272.24 4085,2272.24 4087.56,2250.9 4087.7,2249.72 C118.2 3922.8,2253.9 D124.1@3915,2272.24
NetC103_1: C103.1 C104.2 D133.1 D134.2 R109.1 R110.2 U102.2 VR101.3 | length 2055
  Top Layer w10: C104.2@4591.57,-690 4650,-748.43 4650,-1010 4700,-1060 U102.2
  Top Layer w30: R110.2 R109.1
  Top Layer w40: D134.2@4690.24,-1365 4690.24,-1129.76 U102.2
  Bottom Layer w40: R109.1 4282.17,-1365 D134.2@4690.24,-1365
  Bottom Layer w50: C103.1 4124.21,-810.79 4075,-860 VR101.3 4075,-1195 4220,-1340 R109.1
NetC104_1: C104.1 R122.2 U102.6 | length 970.2
  Top Layer w30: C104.1@4788.43,-690 4800,-701.57 U102.6
  Top Layer w50: R122.2 4207.17,-492.17 4270,-555 4653.43,-555 C104.1@4788.43,-690
NetC105_1: C105.1 R119.2 U101.6 | length 813.4
  Top Layer w50: U101.6 2150,-798.43 2418.43,-530 2595,-530 2632.83,-492.17 R119.2
NetC105_2: C105.2 C116.2 D131.1 D132.2 R107.1 R108.2 U101.2 VR102.3 | length 2508.9
  Top Layer w30: D132.2@1880.24,-1365 1880.24,-1270 1940,-1270 2050,-1160 U101.2 ; R107.1 R108.2
  Bottom Layer w10: U101.2@2055,-1120 2055,-1060 2000,-1005 2000,-751.57 C105.2@2061.57,-690
  Bottom Layer w40: D132.2@1880.24,-1365 1950.24,-1435 2205,-1435 2255,-1385 2547.83,-1385 R108.2
  Bottom Layer w50: R108.2 2650,-1340 2775,-1215 2775,-860 2725.79,-810.79 C116.2
NetC107_1: C107.1 C111.1 D104.2 Q103.3 Q109.1 | length 1034.4
  Top Layer w60: C111.1@1885,-126.57 2110.98,-161.6 2113.96,-162.07 2134.03,-165.18 2134.62,-165.27 2139.67,-166.05 C107.1@2140,-166.1 ; Q103.3 2140,-110 C107.1@2140,-166.1 ; Q109.1 2375,-19.09 2375,-100 2308.9,-166.1 C107.1@2140,-166.1
NetC107_2: C107.2 C111.2 D104.1 R103.1 | length 711.3
  Top Layer w60: C111.2@1885,-323.43 1885.16,-323.41 1885.38,-323.4 2101.97,-306.81 2103.47,-306.7 2135.28,-304.26 2135.57,-304.24 2140,-303.9 2318.9,-303.9 2375,-360 2375,-430.91 D104.1 2496.57,-430.91 R103.1
NetC108_2: C108.2 C115.1 D133.2 D134.1 R121.1 U102.3 | length 1464.8
  Top Layer w30: C108.2 4549.21,-1319.21 C115.1@4598.43,-1270
  Top Layer w40: C108.2 4715,-1480 4830,-1365 4969.76,-1365 4969.76,-1270 4915,-1270 4800,-1155 U102.3
  Top Layer w50: R121.1 4270,-1695 4380,-1585 4500,-1585 4549.21,-1535.79 C108.2
NetC109_1: C109.1 C112.1 D131.2 D132.1 R120.1 U101.3 | length 955
  Top Layer w30: U101.3 2159.76,-1129.76 D131.2@2159.76,-1270 ; C112.1@2251.57,-1270 D131.2@2159.76,-1270 ; C109.1 2274.76,-1480 2159.76,-1365 D131.2@2159.76,-1270
  Top Layer w50: C109.1 2300.79,-1550.79 2330,-1580 2470,-1580 2580,-1690 R120.1@2597.83,-1690
NetC113_1: C113.1 C114.1 D106.2 R106.2 | length 721.7
  Top Layer w60: R106.2 4378.43,-430.91 4475,-430.91 4475,-360 4531.1,-303.9 4710,-303.9 4710.22,-303.91 4964.62,-323.4 C114.1@4965,-323.43
NetC113_2: C113.2 C114.2 D106.1 Q105.1 Q110.3 | length 1077.2
  Top Layer w60: Q105.1 4475,-19.09 4475,-115 4526.1,-166.1 C113.2@4710,-166.1 ; Q110.3 4710,-130 C113.2@4710,-166.1 ; C114.2@4965,-126.57 4711.08,-165.93 C113.2@4710,-166.1
NetCON11_1: CON11.1 D43.1 D44.2 | length 410.8
  Top Layer w100: D43.1@-472.85,2694.91 -281.21,2694.91 CON11.1
NetCON11_2: CON11.2 D41.2 D42.1 | length 1411.4
  Top Layer w100: CON11.2@-355,2890 -570,2890 -670,2790 D42.1 -670,2560 -575,2465 -125,2465 -110,2480 D41.2
NetCON12_1: CON12.1 D23.1 D24.2 | length 389.8
  Top Layer w100: CON12.1 295.11,2700 D24.2@490,2700
NetCON12_2: CON12.2 D21.2 D22.1 | length 1102.3
  Top Layer w100: CON12.2 120,2828.74 120,2575 215,2480 590,2480 670,2560 D21.2
NetCON111_1: CON111.1 D143.1 D144.2 | length 428
  Top Layer w100: D143.1@2935,2694.91 3143.79,2694.91 CON111.1
NetCON111_2: CON111.2 D141.2 D142.1 | length 1361.6
  Top Layer w100: CON111.2@3070,2890 2855,2890 2755,2790 D142.1 2755,2560 2850,2465 3215,2465 3315,2565 D141.2
NetCON112_1: CON112.1 D123.1 D124.2 | length 391.9
  Top Layer w100: CON112.1 3719.72,2698.32 D124.2@3915,2698.32
NetCON112_2: CON112.2 D121.2 D122.1 | length 1110.6
  Top Layer w100: CON112.2 3535,2818.74 D122.1 3535,2585 3640,2480 4015,2480 4095,2560 D121.2
NetD1_2: D1.2 Q1.1 | length 171.8
  Top Layer w60: Q1.1 D1.2
NetD2_1: D2.1 Q2.1 | length 152.1
  Top Layer w60: D2.1 Q2.1
NetD5_6: D5.6 Q8.2 R11.2 R20.2 | length 1094.2
  Top Layer w30: D5.6 -600,-1570 -555,-1525 -400,-1525 -335,-1590 Q8.2
  Bottom Layer w40: R11.2 -790,-1590 -600,-1780 D5.6 -490,-1695 R20.2
NetD7_4: D7.4 Q12.3 R21.2 | length 865.6
  Top Layer w40: Q12.3 R21.2 425,-1742.83 425,-1860 465,-1900 640,-1900 800,-2060 D7.4
NetD8_2: D8.2 Q13.2 R15.1 | length 529.1
  Top Layer w50: R15.1 1210,365 D8.2
  Top Layer w60: R15.1 1130,510 1185,565 Q13.2
NetD9_1: D9.1 Q14.2 R16.2 | length 473.5
  Top Layer w50: D9.1 R16.2
  Top Layer w60: Q14.2 -1185,565 -1130,510 R16.2
NetD101_2: D101.2 Q101.1 | length 171.8
  Top Layer w60: Q101.1 D101.2
NetD102_1: D102.1 Q102.1 | length 152.1
  Top Layer w60: D102.1 Q102.1
NetD105_6: D105.6 Q108.2 R111.2 R120.2 | length 1094.2
  Top Layer w30: D105.6 2825,-1570 2870,-1525 3025,-1525 3090,-1590 Q108.2
  Bottom Layer w40: R111.2 2635,-1590 2825,-1780 D105.6 2935,-1695 R120.2
NetD107_4: D107.4 Q112.3 R121.2 | length 865.6
  Top Layer w40: Q112.3 R121.2 3850,-1742.83 3850,-1860 3890,-1900 4065,-1900 4225,-2060 D107.4
NetD108_2: D108.2 Q113.2 R115.1 | length 529.1
  Top Layer w50: R115.1 4635,365 D108.2
  Top Layer w60: R115.1 4555,510 4610,565 Q113.2
NetD109_1: D109.1 Q114.2 R116.2 | length 473.5
  Top Layer w50: D109.1 R116.2
  Top Layer w60: Q114.2 2240,565 2295,510 R116.2
NetKC1_3: KC1.3 R70.2 | length 684.8
  Bottom Layer w60: KC1.3 R70.2 ; KC1.3@80,-3295 KC1.3@99.04,-3283.87 ; KC1.3@90,-3310 105.74,-3301.34 R70.2 ; KC1.3@90,-3115 KC1.3@99.45,-3120.91 ; KC1.3@125,-3120 R70.2
NetQ1_2: Q1.2 Q1.3 Q3.2 Q14.3 | length 1008.5
  Top Layer w60: Q1.2 Q1.3 Q14.3 -1440,665 -1490,615 -1490,335 -1230,75 Q3.2
NetQ2_2: Q2.2 Q2.3 Q10.2 Q13.3 | length 1044.8
  Top Layer w60: Q10.2 1225,75 1530,380 1530,630 1495,665 Q13.3 Q2.3 Q2.2
NetQ3_1: Q3.1 R1.2 | length 200.9
  Top Layer w60: Q3.1 -1197.84,172.83 R1.2
NetQ4_1: Q4.1 Q9.3 | length 320.6
  Bottom Layer w80: Q9.3 Q4.1
NetQ5_3: Q5.3 Q7.1 | length 321.4
  Bottom Layer w80: Q7.1 Q5.3
NetQ6_1: Q6.1 R3.2 | length 271.4
  Top Layer w60: R3.2 -925,-135 -825,-235 Q6.1
NetQ6_2: Q6.2 R19.1 | length 141.2
  Top Layer w60: Q6.2 -612.83,-135 R19.1
NetQ8_1: Q8.1 R11.1 | length 224.3
  Top Layer w30: R11.1 -440,-1590 -340,-1690 Q8.1
NetQ10_1: Q10.1 R4.1 | length 180.9
  Top Layer w60: R4.1 1177.83,172.83 Q10.1
NetQ11_1: Q11.1 R6.1 | length 228.6
  Top Layer w60: Q11.1 880,-235 925,-190 R6.1
NetQ11_2: Q11.2 R22.1 | length 191.2
  Top Layer w60: R22.1 612.83,-135 Q11.2
NetQ12_1: Q12.1 R12.1 | length 573.6
  Bottom Layer w30: Q12.1 340,-1490 370,-1520 757.17,-1520 R12.1
NetQ13_1: Q13.1 R5.2 | length 180.4
  Top Layer w60: R5.2 Q13.1
NetQ14_1: Q14.1 R2.1 | length 130.6
  Top Layer w60: Q14.1 R2.1
NetQ101_2: Q101.2 Q101.3 Q103.2 Q114.3 | length 1008.5
  Top Layer w60: Q101.2 Q101.3 Q114.3 1985,665 1935,615 1935,335 2195,75 Q103.2
NetQ102_2: Q102.2 Q102.3 Q110.2 Q113.3 | length 1044.8
  Top Layer w60: Q110.2 4650,75 4955,380 4955,630 4920,665 Q113.3 Q102.3 Q102.2
NetQ103_1: Q103.1 R101.2 | length 200.9
  Top Layer w60: Q103.1 2227.16,172.83 R101.2
NetQ104_1: Q104.1 Q109.3 | length 320.6
  Bottom Layer w80: Q109.3 Q104.1
NetQ105_3: Q105.3 Q107.1 | length 321.4
  Bottom Layer w80: Q107.1 Q105.3
NetQ106_1: Q106.1 R103.2 | length 271.4
  Top Layer w60: R103.2 2500,-135 2600,-235 Q106.1
NetQ106_2: Q106.2 R119.1 | length 141.2
  Top Layer w60: Q106.2 2812.17,-135 R119.1
NetQ108_1: Q108.1 R111.1 | length 224.3
  Top Layer w30: R111.1 2985,-1590 3085,-1690 Q108.1
NetQ110_1: Q110.1 R104.1 | length 180.9
  Top Layer w60: R104.1 4602.83,172.83 Q110.1
NetQ111_1: Q111.1 R106.1 | length 228.6
  Top Layer w60: Q111.1 4305,-235 4350,-190 R106.1
NetQ111_2: Q111.2 R122.1 | length 191.2
  Top Layer w60: R122.1 4037.83,-135 Q111.2
NetQ112_1: Q112.1 R112.1 | length 573.6
  Bottom Layer w30: Q112.1 3765,-1490 3795,-1520 4182.17,-1520 R112.1
NetQ113_1: Q113.1 R105.2 | length 180.4
  Top Layer w60: R105.2 Q113.1
NetQ114_1: Q114.1 R102.1 | length 130.6
  Top Layer w60: Q114.1 R102.1
NetR17_1: R17.1 VR1.2 | length 459.2
  Top Layer w30: VR1.2 550,-1015 760,-1225 R17.1
NetR18_2: R18.2 VR1.1 | length 224
  Top Layer w30: VR1.1 750,-1032.83 R18.2
NetR23_1: R23.1 VR2.2 | length 224
  Top Layer w30: R23.1 -750,-1032.83 VR2.2
NetR24_2: R24.2 VR2.1 | length 459.2
  Top Layer w30: R24.2 -760,-1225 -550,-1015 VR2.1
NetR117_1: R117.1 VR101.2 | length 459.2
  Top Layer w30: VR101.2 3975,-1015 4185,-1225 R117.1
NetR118_2: R118.2 VR101.1 | length 224
  Top Layer w30: VR101.1 4175,-1032.83 R118.2
NetR123_1: R123.1 VR102.2 | length 224
  Top Layer w30: R123.1 2675,-1032.83 VR102.2
NetR124_2: R124.2 VR102.1 | length 459.2
  Top Layer w30: R124.2 2665,-1225 2875,-1015 VR102.1
pads on no net: D5.1 D5.2 D5.3 D5.5 D5.7 D5.8 D7.1 D7.2 D7.3 D7.5 D7.7 D7.8 D105.1 D105.2 D105.3 D105.5 D105.7 D105.8 D107.1 D107.2 D107.3 D107.5 D107.7 D107.8 U1.1 U1.5 U1.8 U2.1 U2.5 U2.8 U101.1 U101.5 U101.8 U102.1 U102.5 U102.8

## Silkscreen, mask and mechanical layers (free items; w line width, h text height)
Top Overlay:
  text "PEG" at 1640,6010 h60
  text "PEG" at 1175,2070 h60
  text "PEG" at 2110,2065 h60
  text "PEG" at -50,2040 h40
  text "PEG" at 3375,2040 h40
  text "+" at 3495,-2525 h80
  text "+" at -180,-2575 h80
  text "-" at 3505,-3965 h80
  text "-" at -175,-3975 h80
Mechanical 1:
  lines w10: -1655,-4095 5080,-4095 5080,6440 -1655,6440 -1655,-4095
Drill Drawing:
  the board outline again, w10